# Altium PCB RJ45.PcbDoc
Units mm, origin at the board's own origin, x right, y up, seen from the top; angles counter-clockwise.
Board outline 46.4 x 33.5 mm, 2 copper layers (Top Layer, Bottom Layer), stack 1.569 mm thick; 5 components, 11 nets, 41 pads, 1 vias.
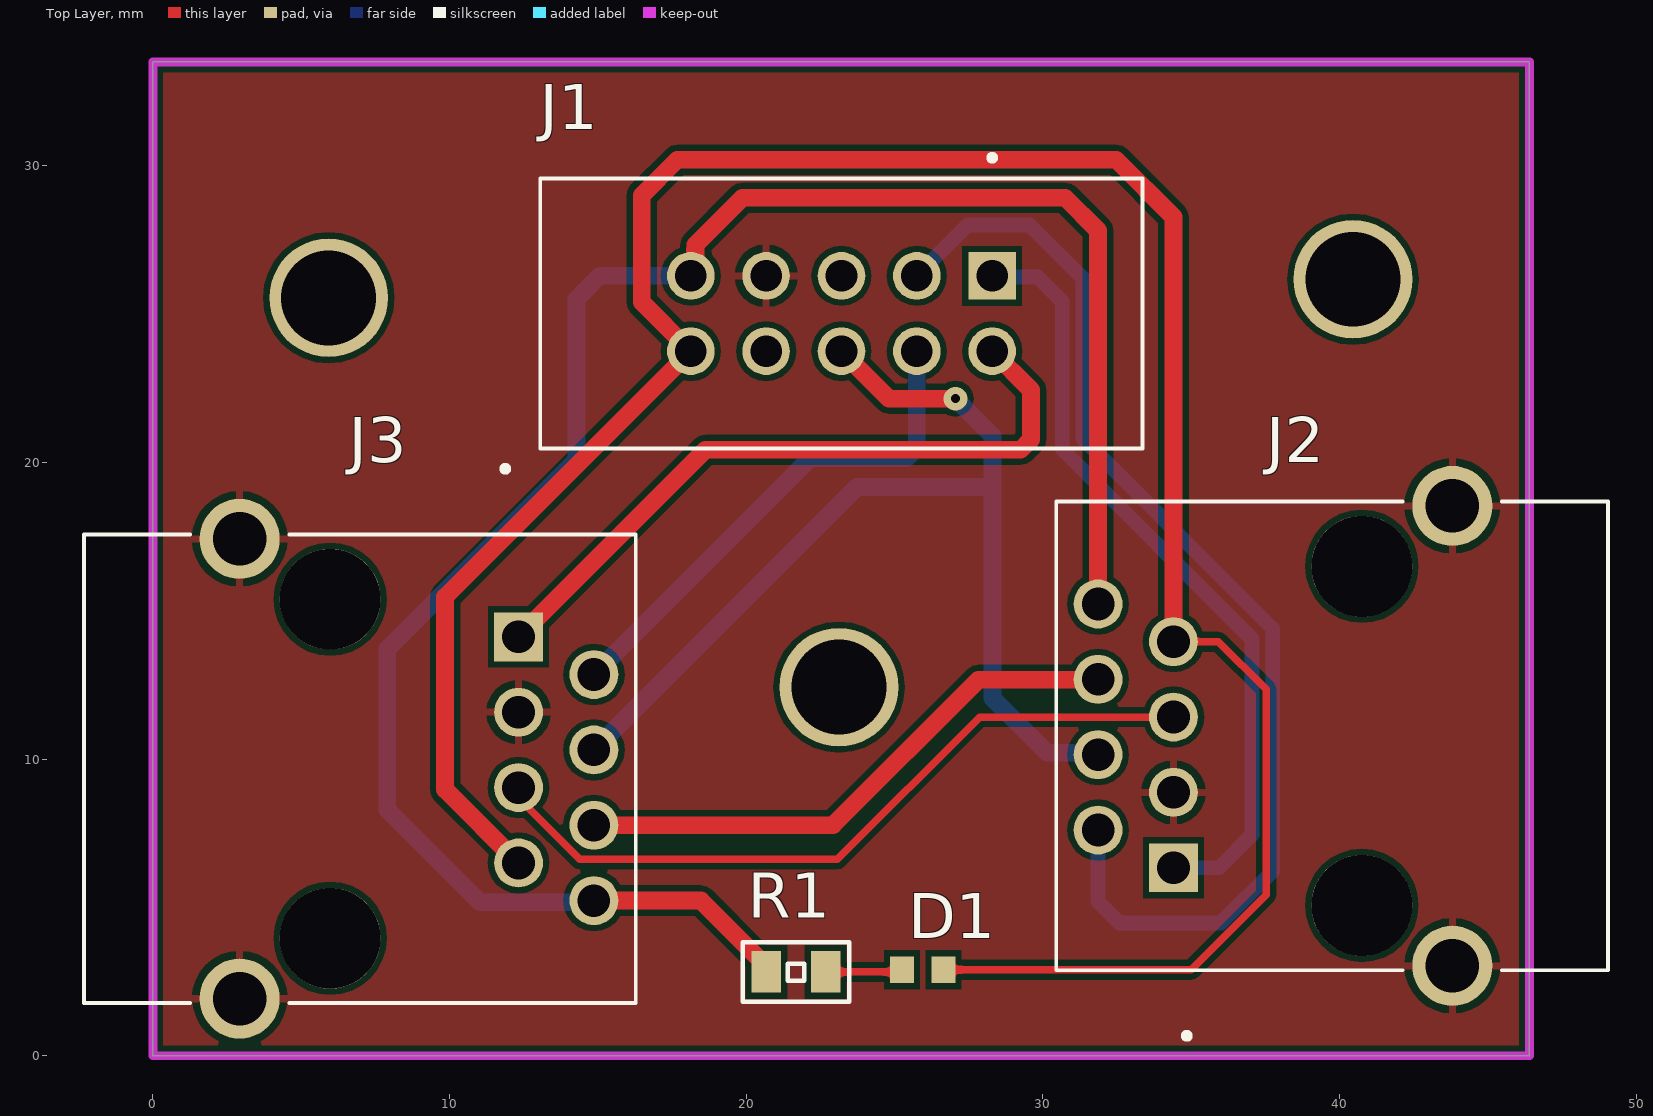
[diagram p0: Top Layer view]
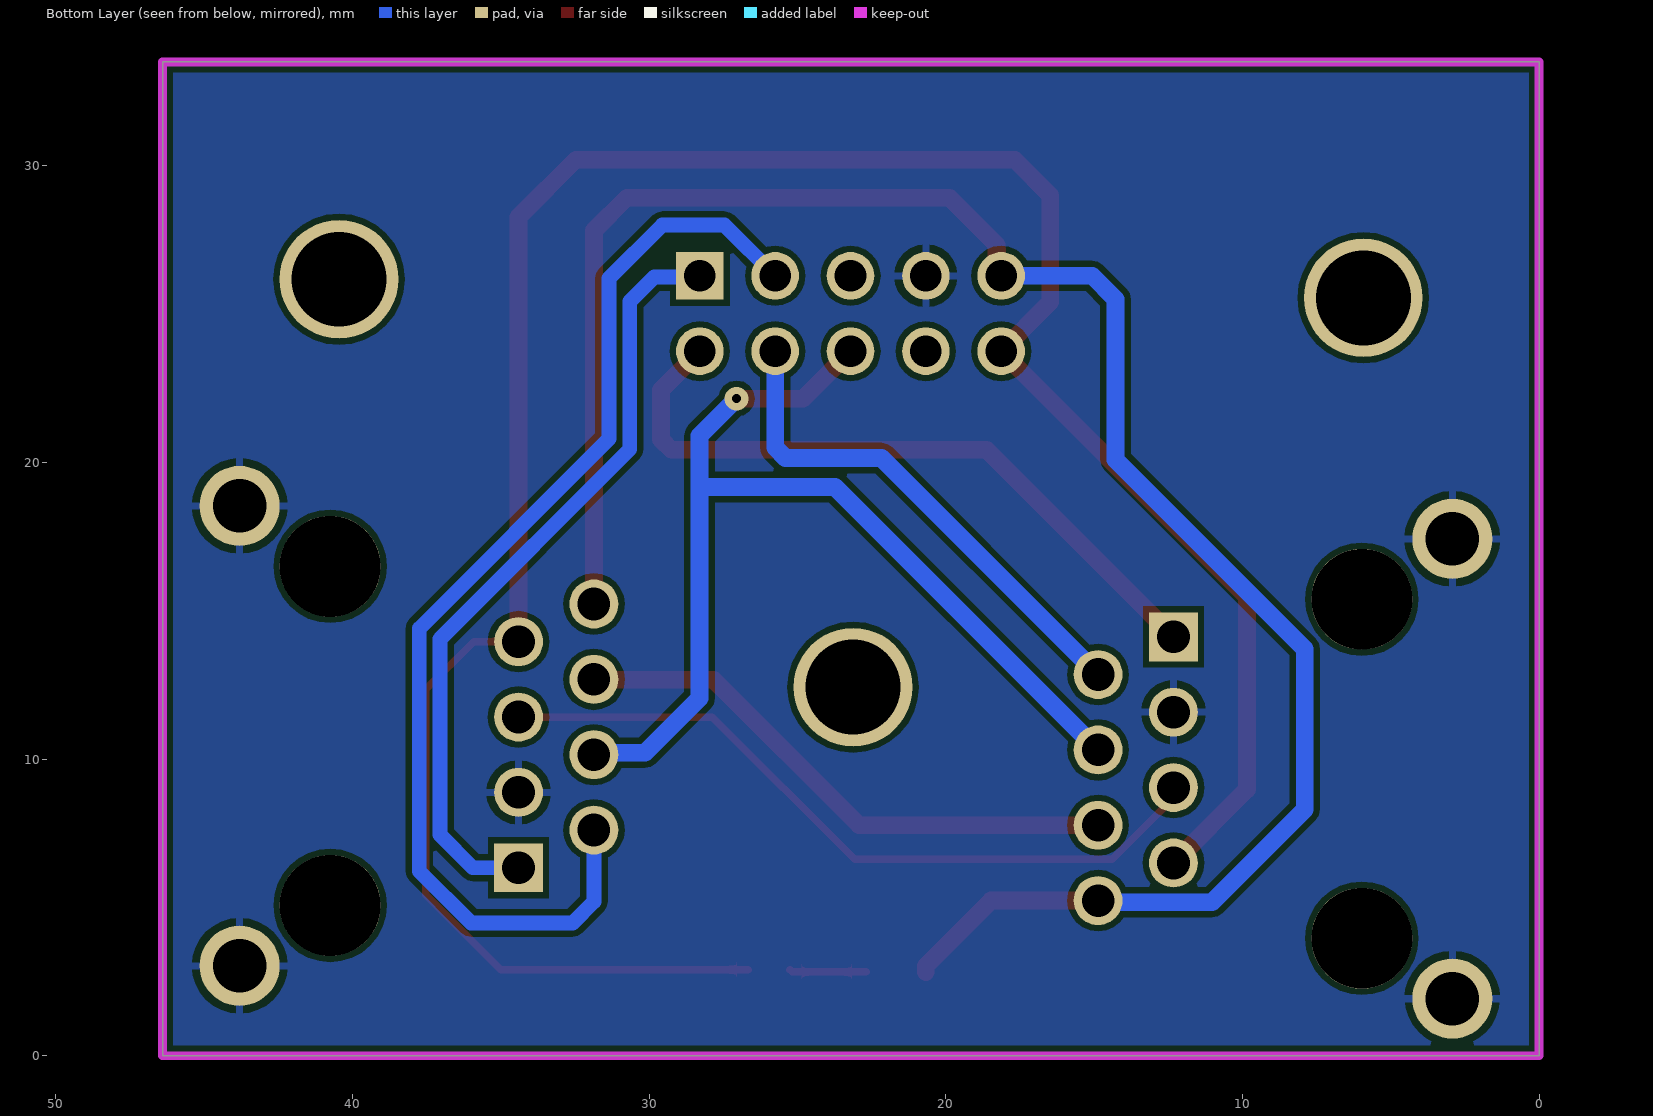
[diagram p1: Bottom Layer view, seen from below]

## Layer stack, top to bottom
Top Solder: solder mask 0.0254, SM-001, Dk 4
Top Layer: signal copper 0.035
Dielectric 1: core 1.4986, Core-043, Dk 4.3
Bottom Layer: signal copper 0.035
Bottom Solder: solder mask 0.0254, SM-001, Dk 4

## Board outline
0,0 0,33.5 46.4,33.5 46.4,0

## Design rules (kind name [scope] priority, off if disabled: settings)
Clearance Clearance_1 [InNetClass('ISO') vs InNet('GND')] p1: gap=1 ignorepadtopadclearanceinfootprint=FALSE
Clearance [All] p2: gap=0.2 ignorepadtopadclearanceinfootprint=FALSE
ComponentClearance [All] p1: gap=0.01 collisioncheckmode=3 verticalgap=0.01 showdistances=FALSE
DiffPairsRouting [All] p1: maxlimit=0.254 minlimit=0.2 mostfreqgap=0.254 toplayer_minwidth=0.25 toplayer_maxwidth=0.381 toplayer_prefwidth=0.381 bottomlayer_minwidth=0.25 bottomlayer_maxwidth=0.381 bottomlayer_prefwidth=0.381 maxuncoupledlength=12.7
HoleSize [All] p1: absolutevalues=TRUE maxlimit=5 minlimit=0.025 maxpercent=80.000 minpercent=20.000
MinimumSolderMaskSliver [All] p1: minsoldermaskwidth=0
PolygonConnect [All] p1: connectstyle=Relief reliefconductorwidth=0.254 reliefentries=4 polygonreliefangle="90 Angle" airgapwidth=0.254
RoutingVias [All] p1: holewidth=0.3 width=1 viastyle="Through Hole" minholewidth=0.3 minwidth=0 maxholewidth=1 maxwidth=4
SilkToSolderMaskClearance [IsPad] p1: minsilkscreentomaskgap=0.1 clearancetoexposedcopper=TRUE
SolderMaskExpansion [All] p1: expansion=0.102 istentingtop=FALSE
UnRoutedNet [All] p1: checkbadconnections=TRUE
Width [All] p1: maxlimit=4 minlimit=0.254 preferedwidth=0.254
24 further rules are at their usual default settings.

## Components (designator, comment, footprint, x,y, rotation, side; value= is the part's Value field where it differs from the comment)
D1 "LED2" 1608[0603] 25.95,2.9 r180 top
J1 "DS1013-10SSIB1" CONNFLY_DS1013-10SSIB1 23.21,25.02 r180 top
J2 "A-2004-2-4-LPS-N-R" ASSMANN_A-2004-2-4-LPS-N-R 40.75,10.783 r90 top
J3 "A-2004-2-4-LPS-N-R" ASSMANN_A-2004-2-4-LPS-N-R 5.975,9.675 r270 top
R1 "10K" "Resistor 0805" 22.675,2.825 r180 top

## Footprints (in the part's own frame and the unit in brackets; to place one, negate y for a bottom-side part, rotate by r counter-clockwise, add the part's x,y. Pads: shape width x height; smd on the part's side, far side on the other; paste and mask are expansions set on the pad)
1608[0603] [mm] "Chip Capacitor, Body 1.6x0.8mm, IPC High Density"
  rect 0.8x0.9 smd: 1(-0.7,0) 2(0.7,0)
  body extent -0.87,-0.48 0.87,0.48, height 1.3
ASSMANN_A-2004-2-4-LPS-N-R [mm]
  rect 1.65x1.65 hole 1.1: 1(-4.445,6.35)
  round 1.65 hole 1.1: 2(-3.175,8.89) 3(-1.905,6.35) 4(-0.635,8.89) 5(0.635,6.35) 6(1.905,8.89) 7(3.175,6.35) 8(4.445,8.89)
  round 2.7 hole 1.8: S1(-7.75,-3.05) S2(7.75,-3.05)
  round 3.4 hole 3.4 unplated: ""(-5.715,0) ""(5.715,0)
  silkscreen extent -10.21,-8.3 7.9,10.3
CONNFLY_DS1013-10SSIB1 [mm]
  rect 1.605x1.605 hole 1.07: 1(-5.08,-1.27)
  round 1.605 hole 1.07: 2(-5.08,1.27) 3(-2.54,-1.27) 4(-2.54,1.27) 5(0,-1.27) 6(0,1.27) 7(2.54,-1.27) 8(2.54,1.27) 9(5.08,-1.27) 10(5.08,1.27)
  silkscreen extent -10.15,-5.35 10.15,4.55
"Resistor 0805" [mm]
  rect 1x1.4 smd: 1(0,0) 2(2,0)
  silkscreen extent -0.8,-1 2.8,1, body extent -0.03,-0.65 2.02,0.65, height 0.41

## Part data
D1: "Typical RED, GREEN, YELLOW, AMBER GaAs LED", LatestRevisionDate=17-Jul-2002, LatestRevisionNote="Re-released for DXP Platform.", PackageDescription="SM LED; 2 Flat Leads", PackageReference=3.2X1.6X1.1, PackageVersion=Feb-2002, Published=8-Jun-2000, Publisher="Altium Limited"
J1: "Socket; IDC; male; PIN: 10; straight; THT; gold plated; 2.54mm", Package=None, Availability=Unavailable, BuyPart=https://www.snapeda.com/parts/DS1013-10SSIB1/Connfly/view-part/951223/?ref=eda, MF=Connfly, MP=DS1013-10SSIB1, Price=None, SnapEDA_Link=https://www.snapeda.com/parts/DS1013-10SSIB1/Connfly/view-part/951223/?ref=snap
J2 J3: "Jack Modular Connector 8p8c _RJ45, Ethernet_ 90Â° Angle _Right_ Shielded", Package=None, Availability=Unavailable, MF="Assmann WSW", MP=A-2004-2-4-LPS-N-R, Price=None, SnapEDA_Link=https://www.snapeda.com/parts/A-2004-2-4-LPS-N-R/Assmann%20WSW%20Components/view-part/454861/?ref=snap
R1: library part Resistor

## Free pads (board coordinates)
  round 4 hole 3.2: 3(40.45,26.175) 4(5.925,25.55) 5(23.125,12.425)

## Via types
v1: diameter 0.8, hole 0.3, Top Layer to Bottom Layer, 1 vias

## Nets (pads, with @x,y where several pads share a name; then routed paths per layer and width w, separated by ;. In a path a pad name is that pad's centre, name@x,y a point inside that pad or via, vN(x,y) a via of type N, cw(c..) or ccw(c..) an arc to the next point about the centre after c; other vN are vias at no path point)
485_A: J1.3 J2.2 | length 39
  Bottom Layer w0.5: J1.3 27.46,28 29.557,28 31.35,26.207 31.35,20.8 37.75,14.4 37.75,6.225 36,4.475 32.575,4.475 31.86,5.19 J2.2
485_A_1: J1.4 J3.2 | length 17.3
  Bottom Layer w0.6: J3.2 22.165,20.15 25.399,20.15 25.75,20.501 J1.4
485_B: J1.1 J2.1 | length 26.5
  Bottom Layer w0.5: J1.1 28.33,26.25 29.825,26.25 30.65,25.425 30.65,20.45 37.05,14.05 37.05,7.45 35.938,6.338 J2.1
485_B_1: J1.2 J3.1 | length 23.5
  Top Layer w0.6: J3.1 18.63,20.425 29.249,20.425 29.6,20.776 29.6,22.44 J1.2
+5v_RJ: J1.6 J2.4 J3.4 | length 36.6
  Top Layer w0.6: J1.6 24.81,22.15 v1(27.05,22.15)
  Bottom Layer w0.6: J3.4 23.73,19.175 28.299,19.175 ; v1(27.05,22.15) 28.299,20.901 28.299,19.175 ; J2.4 31.793,10.215 30.135,10.215 28.299,12.051 28.299,19.175
+24: D1.1 J1.10 J2.7 J3.7 | length 83.8
  Top Layer w0.254: D1.1 35,2.9 37.525,5.425 37.525,12.35 35.917,13.958 J2.7
  Top Layer w0.6: J3.7 9.85,8.975 9.85,15.47 J1.10 16.475,25.405 16.475,29 17.675,30.2 32.475,30.2 34.4,28.275 J2.7
GND_24: J1.9 J2.8 J3.8 R1.2 | length 67.6
  Top Layer w0.6: J3.8 18.47,5.23 20.675,3.025 R1.2 ; J1.9 18.289,26.449 18.289,27.339 19.875,28.925 30.75,28.925 31.86,27.815 J2.8
  Bottom Layer w0.6: J3.8 14.81,5.175 11.025,5.175 7.899,8.301 7.899,13.712 14.275,20.089 14.275,25.5 15.065,26.29 J1.9
GND_ISO: J1.7 J2.3 J2.S1 J2.S2 J3.3 J3.S1 J3.S2
NetD1_2: D1.2 R1.1 | length 2.6
  Top Layer w0.254: R1.1 25.175,2.825 D1.2
NetJ2_5: J2.5 J3.5 | length 25.3
  Top Layer w0.254: J3.5 12.325,8.681 14.388,6.618 23.068,6.618 27.868,11.418 J2.5
NetJ2_6: J2.6 J3.6 | length 19
  Top Layer w0.6: J3.6 22.92,7.77 27.825,12.675 31.847,12.675 J2.6
pads on no net: J1.5 J1.8 J2. J3.

## Polygon pours and split planes (outlines as drawn)
GND_ISO on Top Layer "GND" (solid, remove dead copper, pour order 0): 0,0 0,33.5 46.4,33.5 46.4,0
GND_ISO on Bottom Layer "GND" (solid, remove dead copper, pour order 1): 0,0 0,33.5 46.4,33.5 46.4,0

## Keep-outs
Keep-Out Layer:
  the board outline again, w0.3